# Altium PCB PCB1.PcbDoc
Units mil, origin at the board's own origin, x right, y up, seen from the top; angles counter-clockwise.
Board outline 2362.2 x 2362.2 mil, 2 copper layers (Top Layer, Bottom Layer); 63 components, 61 nets, 255 pads, 256 vias.
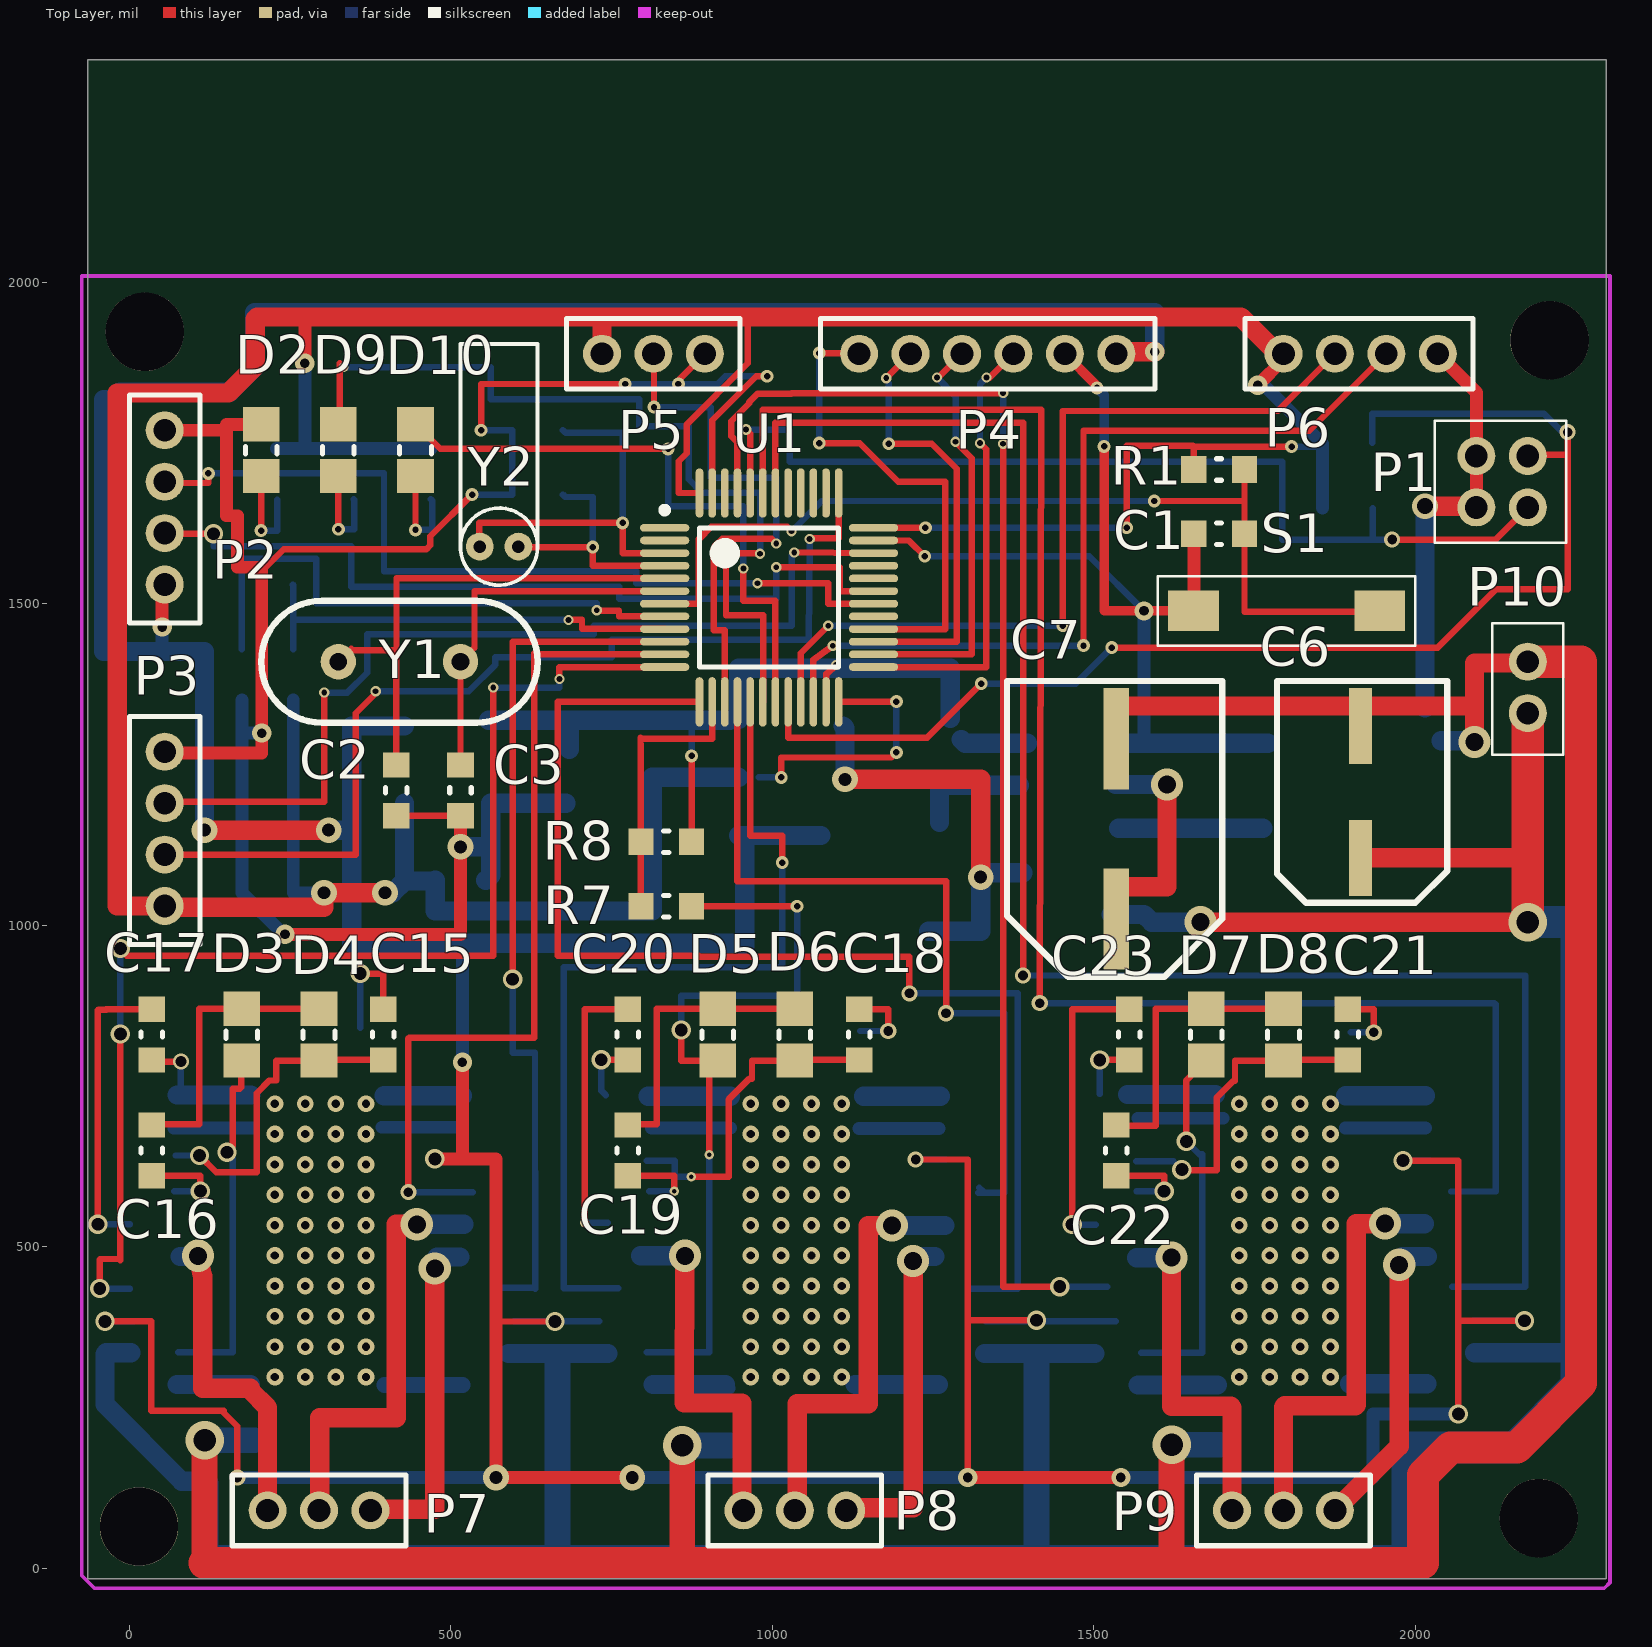
[diagram p0: Top Layer view]
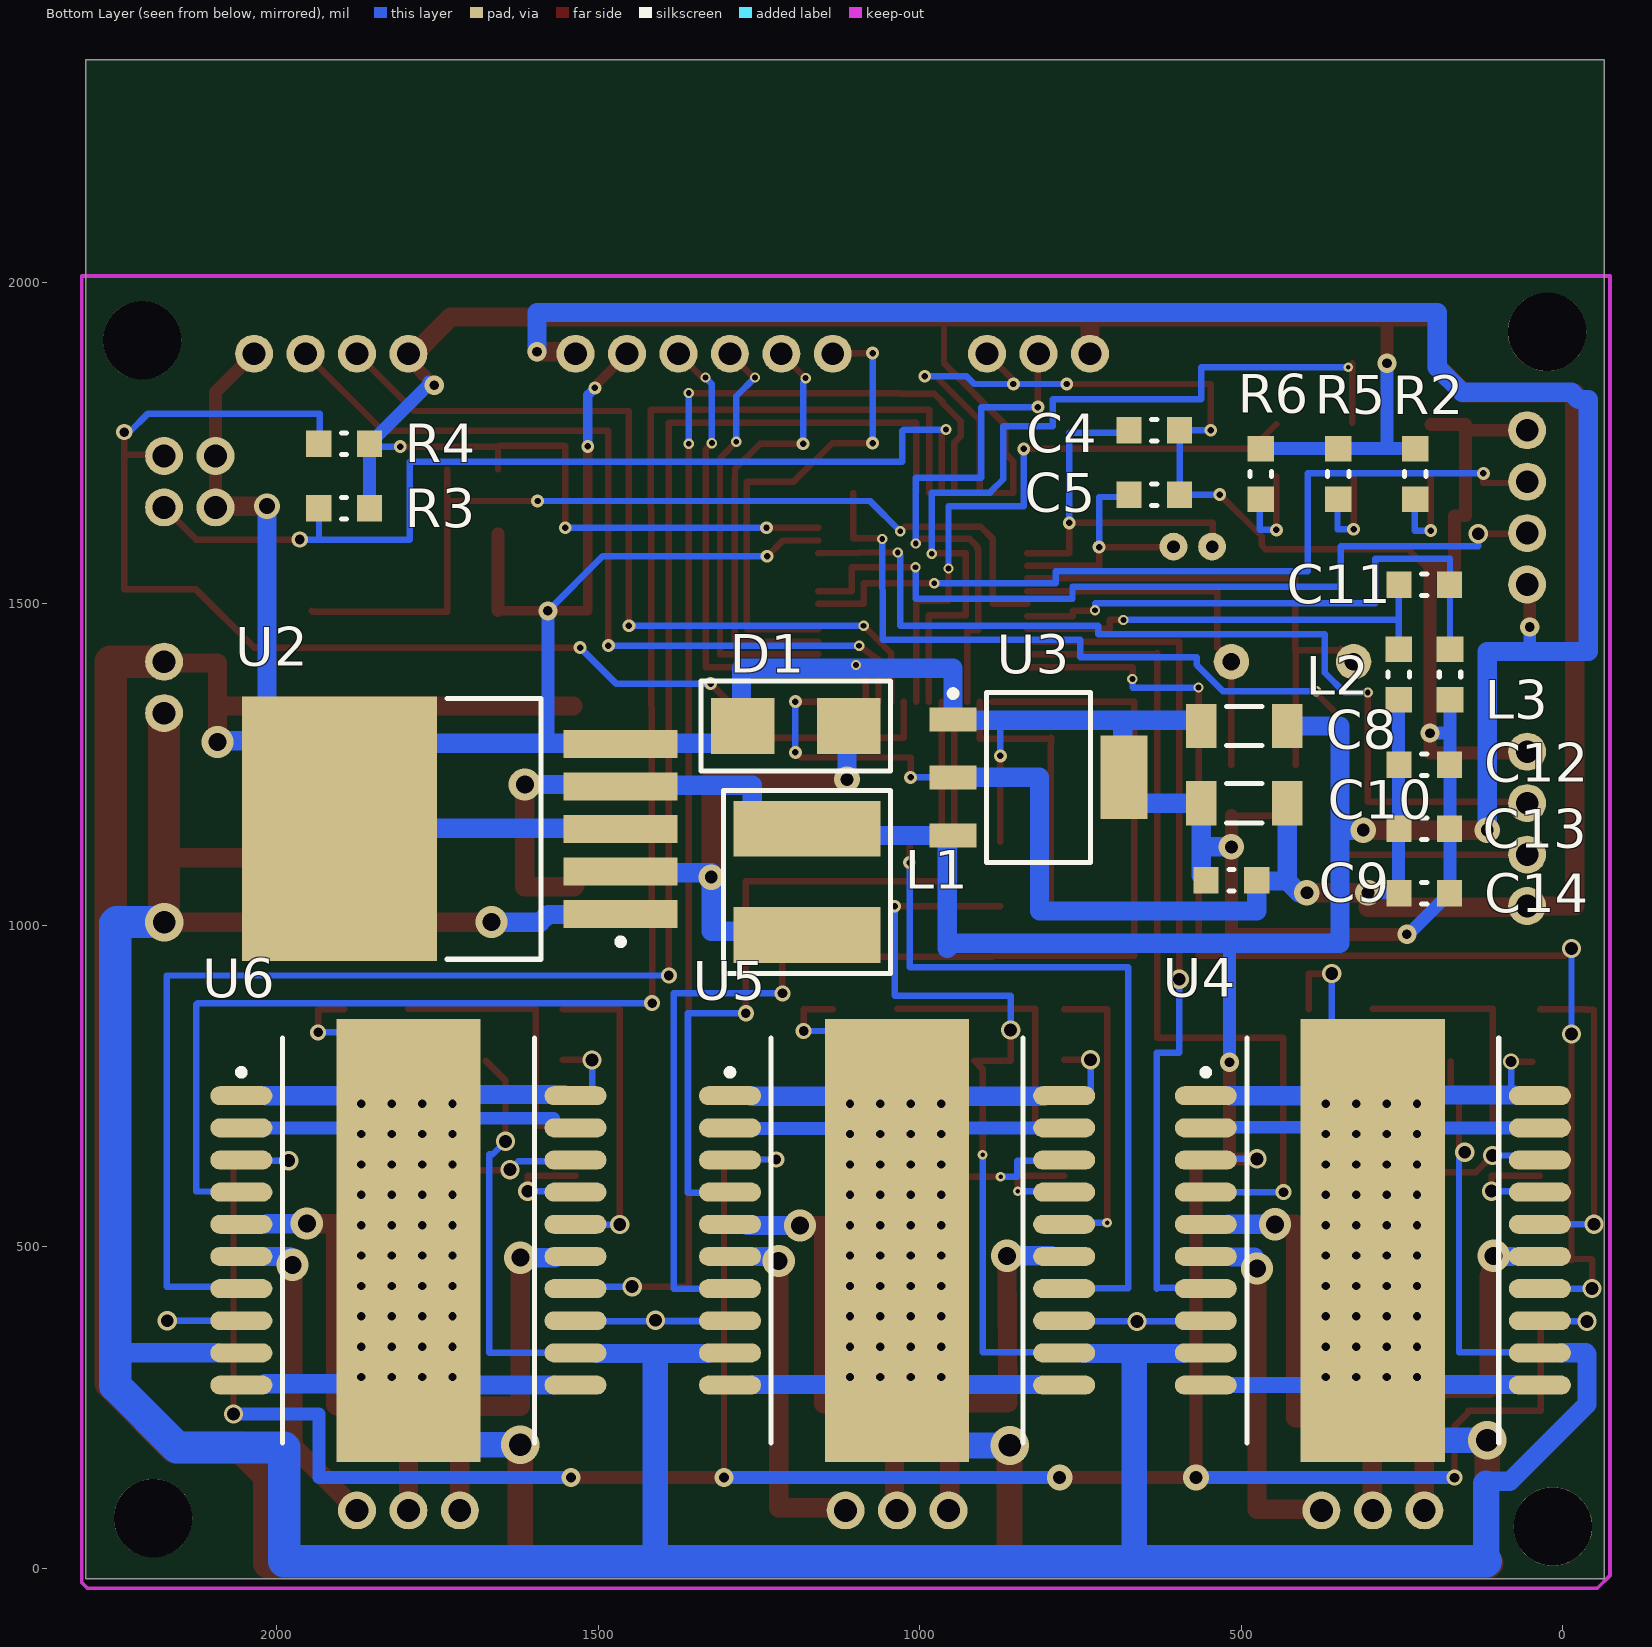
[diagram p1: Bottom Layer view, seen from below]

## Layer stack, top to bottom
Top Solder: solder mask 0.4, Solder Resist, Dk 3.5
Top Layer: signal copper 1.4
Dielectric1: dielectric 12.6, FR-4, Dk 4.8
Bottom Layer: signal copper 1.4
Bottom Solder: solder mask 0.4, Solder Resist, Dk 3.5

## Board outline
-65,-16 2297.2,-16 2297.2,2346.2 -25.63,2346.2 -65,2346.2

## Design rules (kind name [scope] priority, off if disabled: settings)
Clearance [All] p1: gap=7.87
FabricationTestPointUsage TestPointUsage [All] p1: valid=0 allowmultiple=FALSE
FabricationTestpoint Testpoint [All] p1: side=3 testpointundercomponent=TRUE minsize=40 maxsize=100 preferedsize=60 minholesize=0 maxholesize=40 preferedholesize=32 testpointgrid=1 allowsidetop=TRUE allowsidebottom=TRUE usegrid=TRUE gridtolerance=0.01
HoleSize [All] p1: absolutevalues=TRUE maxlimit=100 minlimit=9 maxpercent=80.000 minpercent=20.000
PolygonConnect [All] p1: connectstyle=Relief reliefconductorwidth=10 reliefentries=4 polygonreliefangle="90 Angle" airgapwidth=10
RoomDefinition Sheet1 [InComponentClass('Sheet1')] p1: confinementstyle=ConfineIn formatcopy=TRUE lockcomponents=FALSE outline -65,-20 -59.64,-15.44 2295,-15.44 2295,1985 -65,1985
RoutingPriority [All] p1: routingpriority=10
RoutingVias [All] p1: holewidth=23.62 width=39.37 viastyle="Through Hole" minholewidth=28 minwidth=50 maxholewidth=28 maxwidth=50
SolderMaskExpansion [All] p1: expansion=4
Width [All] p1: maxlimit=100 minlimit=5 preferedwidth=7.87 minimp=50.000000 maximp=50.000000 favimp=50.000000
26 further rules are at their usual default settings.

## Components (designator, comment, footprint, x,y, rotation, side; value= is the part's Value field where it differs from the comment)
C1 "Cap" 0603 1695,1609 r0 top
C2 "Cap" 0603 415,1210 r90 top
C3 "Cap" 0603 515,1210 r270 top
C4 "Cap" 0603 635,1770 r0 bottom
C5 "Cap" 0603 635,1670 r180 bottom
C6 "Cap Pol1" "25V 100uF 6*7" 1915,1210 r180 top
C7 "Cap Pol1" "25V 330uF 8*10" 1535,1150 r180 top
C8 "Cap Pol1" 1206 495,1310 r0 bottom
C9 "Cap" 0603 515,1070 r180 bottom
C10 "Cap Pol1" 1206 495,1190 r0 bottom
C11 "Cap" 0603 215,1530 r0 bottom
C12 "Cap" 0603 215,1250 r0 bottom
C13 "Cap" 0603 215,1150 r0 bottom
C14 "Cap" 0603 215,1050 r0 bottom
C15 "Cap" 0603 395,830 r270 top
C16 "Cap" 0603 35,650 r270 top
C17 "Cap" 0603 35,830 r90 top
C18 "Cap" 0603 1135,830 r270 top
C19 "Cap" 0603 775,650 r270 top
C20 "Cap" 0603 775,830 r90 top
C21 "Cap" 0603 1895,830 r270 top
C22 "Cap" 0603 1535,650 r270 top
C23 "Cap" 0603 1555,830 r90 top
D1 "Diode 1N4003" SMA 1195,1310 r180 bottom
D2 "D2" 0805 205,1739 r90 top
D3 "Diode 1N914" 0805 175,830 r90 top
D4 "Diode 1N914" 0805 295,830 r270 top
D5 "Diode 1N914" 0805 915,830 r90 top
D6 "Diode 1N914" 0805 1035,830 r270 top
D7 "Diode 1N914" 0805 1675,830 r90 top
D8 "Diode 1N914" 0805 1795,830 r270 top
D9 "D2" 0805 325,1739 r90 top
D10 "D2" 0805 445,1739 r90 top
L1 "Inductor" "330uH 5.8*5*4" 1175,1070 r0 bottom
L2 "Inductor" 0603 255,1390 r90 bottom
L3 "Inductor" 0603 175,1390 r90 bottom
P1 "BOOT" "2X2P 2MM" 2095,1730 r0 top
P2 "USART1" "4P 2mm" 55,1530 r90 top
P3 "SW" "4P 2mm" 55,1030 r90 top
P4 "RC" "6P 2mm" 1535,1889 r180 top
P5 "YAW_ANGLE" "3P 2mm" 735,1889 r0 top
P6 "MPU6050" "4P 2mm" 1795,1889 r0 top
P7 "Roll" "3P 2mm" 375,90 r180 top
P8 "Pitch" "3P 2mm" 1115,90 r180 top
P9 "Yaw" "3P 2mm" 1875,90 r180 top
P10 "Power" "2P 2mm" 2175,1330 r90 top
R1 "Res2" 0603 1695,1709 r0 top
R2 "Res2" 0603 229,1702 r90 bottom
R3 "Res2" 0603 1895,1649 r0 bottom
R4 "Res2" 0603 1895,1749 r0 bottom
R5 "Res2" 0603 349,1702 r270 bottom
R6 "Res2" 0603 469,1702 r270 bottom
R7 "Res2" 0603 835,1030 r180 top
R8 "Res2" 0603 835,1130 r0 top
S1 "SW-PB" SW3*6 1655,1489 r0 top
U1 "STM32F103C8T6" STM32F103C8T6 995,1510 r0 top
U2 "LM2575S" LM2575S-TO-263-5 1715,1150 r0 bottom
U3 "AMS1117" AMS1117 815,1230 r180 bottom
U4 "L6234D" L6234DD 295,510 r180 bottom
U5 "L6234D" L6234DD 1035,510 r180 bottom
U6 "L6234D" L6234DD 1795,510 r180 bottom
Y1 "8M" "XTAL 8M" 515,1410 r180 top
Y2 "32.768K" "XTAL 32.768K" 575,1589 r270 top

## Footprints (in the part's own frame and the unit in brackets; to place one, negate y for a bottom-side part, rotate by r counter-clockwise, add the part's x,y. Pads: shape width x height; smd on the part's side, far side on the other; paste and mask are expansions set on the pad)
"2P 2mm" [mm]
  round 1.5 hole 0.9: 1(0,0) 2(2.032,0)
  silkscreen extent -1.65,-1.4 3.56,1.4
"2X2P 2MM" [mm]
  round 1.5 hole 0.9: 1(0,0) 2(0,-2.032) 3(2.032,-2.032) 4(2.032,0)
  silkscreen extent -1.65,-3.43 3.56,1.4
"3P 2mm" [mm]
  round 1.5 hole 0.9: 1(0,0) 2(2.032,0) 3(4.064,0)
  silkscreen extent -1.4,-1.4 5.46,1.4
"4P 2mm" [mm]
  round 1.5 hole 0.9: 1(0,0) 2(2.032,0) 3(4.064,0) 4(6.096,0)
  silkscreen extent -1.52,-1.4 7.49,1.4
"6P 2mm" [mm]
  round 1.5 hole 0.9: 1(0,0) 2(2.032,0) 3(4.064,0) 4(6.096,0) 5(8.128,0) 6(10.16,0)
  silkscreen extent -1.52,-1.4 11.68,1.4
"25V 100uF 6*7" [mm]
  rect 0.9x3 smd: 1(0,2.667) 2(0,-2.54)
  silkscreen extent -3.43,-4.32 3.3,4.44
"25V 330uF 8*10" [mm]
  rect 1x4 smd: 1(0,3.556) 2(0,-3.556)
  silkscreen extent -4.19,-5.84 4.32,5.84
"330uH 5.8*5*4" [mm]
  rect 5.8x2.2 smd: 1(0,2.159) 2(0,-2.032)
  silkscreen extent -3.3,-3.56 3.3,3.68
0603 [mm] "Chip Resistor, 2-Leads, Body 1.6x0.8mm, IPC Low Density"
  rect 1x1.05 smd: 1(-1,0) 2(1,0)
  silkscreen extent -0.1,-0.43 0.1,0.43, body extent -0.8,-0.4 0.8,0.4, height 0.5
0805 [mm] "Chip Resistor, 2-Leads, Body 2.0x1.3mm, IPC Low Density"
  rect 1.35x1.45 smd: 1(-1.025,0) 2(1.025,0)
  silkscreen extent -0.15,-0.63 0.15,0.63, body extent -1,-0.64 1,0.64, height 1.25
1206 [mm] "Chip Resistor, 2-Leads, Body 3.2x1.6mm, IPC Low Density"
  rect 1.2x1.75 smd: 1(-1.7,0) 2(1.7,0)
  silkscreen extent -0.7,-0.77 0.7,0.77, body extent -1.6,-0.8 1.6,0.8, height 1.6
AMS1117 [mm] "SOT223, 4-Leads, Body 6.7x7.3mm (max), Pitch 2.29mm, IPC Low Density"
  rect 1.85x0.95 smd: 1(-3.375,2.29) 2(-3.375,0) 3(-3.375,-2.29)
  rect 1.85x3.3 smd: 4(3.375,0)
  silkscreen extent -3.5,-3.35 2.05,3.44, body extent -1.86,-3.35 1.86,3.35, height 1.8
L6234DD [mm] "SOIC, 20-Leads, Body 16.0x11.1mm (max), Pitch 1.27mm, IPC Low Density"
  oval 2.45x0.75 smd: 1(-6.6,5.715) 2(-6.6,4.445) 3(-6.6,3.175) 4(-6.6,1.905) 5(-6.6,0.635) 6(-6.6,-0.635) 7(-6.6,-1.905) 8(-6.6,-3.175) 9(-6.6,-4.445) 10(-6.6,-5.715) 11(6.6,-5.715) 12(6.6,-4.445) 13(6.6,-3.175) 14(6.6,-1.905) 15(6.6,-0.635) 16(6.6,0.635) 17(6.6,1.905) 18(6.6,3.175) 19(6.6,4.445) 20(6.6,5.715)
  rect 5.7x17.5 smd: 21(0,0)
  silkscreen extent -6.73,-8 4.98,8, body extent -5.55,-8 5.55,8, height 3.6
LM2575S-TO-263-5 [mm] "D2-PAK, 6-Pads, Body 9.7x10.3mm (max), IPC Low Density"
  rect 4.5x1.1 smd: 1(-6.35,3.36) 2(-6.35,1.68) 3(-6.35,0) 4(-6.35,-1.68) 5(-6.35,-3.36)
  rect 7.7x10.45 smd: 6(4.75,0)
  silkscreen extent -6.47,-5.15 0.5,5.15, body extent -3.2,-5.15 6.46,5.15, height 4.83
SMA [mm]
  rect 2.5x2.2 smd: 1(-2.032,0) 2(2.159,0)
  silkscreen extent -3.68,-1.78 3.81,1.78
STM32F103C8T6 [mm] "TSQFP, 48-Leads, Body 9.0x9.0mm (max), Pitch 0.50mm, IPC Low Density"
  oval 1.95x0.3 smd: 1(-4.125,2.75) 2(-4.125,2.25) 3(-4.125,1.75) 4(-4.125,1.25) 5(-4.125,0.75) 6(-4.125,0.25) 7(-4.125,-0.25) 8(-4.125,-0.75) 9(-4.125,-1.25) 10(-4.125,-1.75) 11(-4.125,-2.25) 12(-4.125,-2.75) 25(4.125,-2.75) 26(4.125,-2.25) 27(4.125,-1.75) 28(4.125,-1.25) 29(4.125,-0.75) 30(4.125,-0.25) 31(4.125,0.25) 32(4.125,0.75) 33(4.125,1.25) 34(4.125,1.75) 35(4.125,2.25) 36(4.125,2.75)
  oval 0.3x1.95 smd: 13(-2.75,-4.125) 14(-2.25,-4.125) 15(-1.75,-4.125) 16(-1.25,-4.125) 17(-0.75,-4.125) 18(-0.25,-4.125) 19(0.25,-4.125) 20(0.75,-4.125) 21(1.25,-4.125) 22(1.75,-4.125) 23(2.25,-4.125) 24(2.75,-4.125) 37(2.75,4.125) 38(2.25,4.125) 39(1.75,4.125) 40(1.25,4.125) 41(0.75,4.125) 42(0.25,4.125) 43(-0.25,4.125) 44(-0.75,4.125) 45(-1.25,4.125) 46(-1.75,4.125) 47(-2.25,4.125) 48(-2.75,4.125)
  silkscreen extent -4.25,-2.75 2.75,3.57, body extent -3.5,-3.5 3.5,3.5, height 1.6
SW3*6 [mm]
  rect 2x1.6 smd: 1(0,0) 2(7.366,0)
  silkscreen extent -1.4,-1.38 8.76,1.37
"XTAL 8M" [mm] "pin: 0.43,  pin2pin: 4.88, size: 11.05*4.7"
  round 1.4 hole 0.7: 1(0,0) 2(4.826,0)
  silkscreen extent -3.05,-2.41 7.87,2.41
"XTAL 32.768K" [mm] "3*8"
  round 1.1 hole 0.5: 1(0,0.762) 2(0,-0.762)
  silkscreen extent -8,-1.52 1.52,1.52

## Part data
C1 C2 C3 C4 C5 C9 C11 C12 C13 C14 C15 C16 C17 C18 C19 C20 C21 C22 C23: "Capacitor"
C6 C7 C8 C10: "Polarized Capacitor (Radial)"
D1: "1 Amp General Purpose Rectifier"
D2 D9 D10: library part LED3, "Typical BLUE SiC LED"
D3 D4 D5 D6 D7 D8: "High Conductance Fast Diode"
P1: library part "Header 2X2", "Header, 2-Pin, Dual row"
P2 P3: library part "Header 4H", "Header, 4-Pin, Right Angle"
P4: library part "Header 3X2", "Header, 3-Pin, Dual row"
P5 P7 P8 P9: library part "Header 3", "Header, 3-Pin"
P6: library part "Header 4", "Header, 4-Pin"
P10: library part "Header 2", "Header, 2-Pin"
R1 R2 R3 R4 R5 R6 R7 R8: "Resistor"
S1: "Switch"
Y1 Y2: library part XTAL, "Crystal Oscillator"

## Free pads (board coordinates)
  round 122.05 hole 122.05: 0(2192,78) 1(15,65) 2(2209,1910) 3(24,1923)

## Via types
v1: diameter 25.98, hole 12.99, Top Layer to Bottom Layer, tented top, 120 vias
v2: diameter 20, hole 10, Top Layer to Bottom Layer, 33 vias
v3: diameter 30, hole 20, Top Layer to Bottom Layer, 25 vias
v4: diameter 16, hole 9, Top Layer to Bottom Layer, 24 vias
v5: diameter 50, hole 28, Top Layer to Bottom Layer, 12 vias
v6: diameter 25, hole 15, Top Layer to Bottom Layer, 11 vias
v7: diameter 30, hole 15, Top Layer to Bottom Layer, 10 vias
v8: diameter 40, hole 20, Top Layer to Bottom Layer, 9 vias
v9: diameter 15, hole 7, Top Layer to Bottom Layer, 5 vias
v10: diameter 60, hole 35, Top Layer to Bottom Layer, 4 vias
v11: diameter 25, hole 17, Top Layer to Bottom Layer, 1 vias
v12: diameter 17, hole 9, Top Layer to Bottom Layer, 1 vias
v13: diameter 40, hole 25, Top Layer to Bottom Layer, 1 vias

## Nets (pads, with @x,y where several pads share a name; then routed paths per layer and width w, separated by ;. In a path a pad name is that pad's centre, name@x,y a point inside that pad or via, vN(x,y) a via of type N, cw(c..) or ccw(c..) an arc to the next point about the centre after c; other vN are vias at no path point)
3.3V: C9.2 C10.1 C12.2 C13.2 C14.2 L2.1 P3.1 P5.1 P6.1 R1.1 R2.2 R3.1 R4.1 R5.1 R6.1 U1.24 U1.36 U1.48 U3.2 | length 6864.2
  Top Layer w10: 865.5,1732.5 854.6,1721.6 854.6,1672.4 U1.48 U1.48@887,1672.67 ; 867,1734 867,1779 962,1874 962,1937 ; v2(1014,1230) 1014,1261 1185,1261 v2(1193,1269) ; U1.24@1103.67,1348 v2(1193,1348) ; U1.36 v2(1238,1618.27) ; v2(1551,1618.27) 1551,1746 1654.26,1746 1655.63,1744.63 ; R1.1 1655.63,1744.63 ; v2(1807.63,1744.63) 1655.63,1744.63
  Top Layer w20: P3.1 P3.1@57,1028 ; 272,1946 273,1945 v7(273,1874) ; v7(1755,1840) 1795,1880 P6.1
  Top Layer w30: P3.1 -19,1030 -19,1828 154,1828 196,1870 196,1943 ; P3.1@57,1028 302.63,1028 v8(302.63,1050.63) v8(397.63,1050.63) ; 199,1946 1729,1946 P6.1@1795,1880 ; P5.1 735,1944
  Bottom Layer w10: C14.2 C14.2@255,1050.63 ; v8(397.63,1050.63) v8@409.63,1050.63 ; U3.2@979,1230 v2(1014,1230) ; v2(1193,1269) v2(1193,1348) ; v2(1238,1618.27) v2(1551,1618.27) ; v2(1807.63,1744.63) R4.1@1851.26,1744.63
  Bottom Layer w20: R2.2 R6.1 ; L2.1 255,1050.63 v8(302.63,1050.63) ; 273,1741.37 v7(273,1874) ; v7@1763,1845 1763,1841.63 R4.1 R3.1
  Bottom Layer w30: v8@409.63,1050.63 428.07,1069.07 ; C10.1 428.07,1069.07 ; U3.2 947.5,1230.37 813.37,1230.37 813.37,1022.37 475.63,1022.37 C9.2 474.7,1069.07 428.07,1069.07
5V: C7.1 C8.1 L1.2 P2.1 P4.1 U2.4 U3.3 U4.3 U4.8 U4.13 U5.3 U5.8 U5.13 U6.3 U6.8 U6.13 | length 10165.4
  Top Layer w10: v3(-38,384) 34,384 34,245 147,245 147,242 168,221 v6(168,141) ; 570.16,383.84 v3(661.84,383.84) ; v6(1222.84,635.84) 1304.16,635.84 v7(1304.16,141.16) ; 1304.16,385.84 v3(1410.84,385.84) ; v3@1983,634 2067,634 v3(2067,240) ; 2068,385 v3(2170,385)
  Top Layer w20: v7(51,1464) 51,1526 P2.1 ; v3(475.16,636.84) 570.16,636.84 v8(570.16,141.16) v8(782.16,141.16) ; 518,636.84 v7(518,787) ; v7(1304.16,141.16) v7(1542.16,141.16)
  Top Layer w30: v8(117,1148) v8(310,1148) ; C7.1@1536,1062 1538,1060 1614,1060 v5(1614,1219) ; P4.1@1538,1892 v7(1595,1892)
  Bottom Layer w10: v3(-38,384) U4.13@6,384 ; v3(475.16,636.84) U4.3@520.84,636.84 ; 518,968 522,972 ; U4.8@599,384 U5.13@731,384 ; v6(1222.84,635.84) U5.3@1269.84,635.84 ; U5.8@1332,384 U6.13@1534.16,384 ; v3(1981,634) U6.3@2022,634 ; U6.8@2091,385 v3(2170,385)
  Bottom Layer w20: 51,1426 v7(51,1464) ; v6(168,141) v8(570.16,141.16) ; v7(518,787) 518,968 ; v8(782.16,141.16) v7(1304.16,141.16) ; v7(1542.16,141.16) 1934,141.16 1934,240 v3(2067,240)
  Bottom Layer w30: v8(117,1148) 117,1426 -40,1426 -40,1818 -25,1818 -14,1829 156,1829 195,1868 195,1953 1595,1953 v7(1595,1892) ; v8(310,1148) 346,1148 ; C8.1 346,1310 346,972 949,972 957,964 957,1138.84 U3.3@956,1139.84 ; U3.3 L1.2@1075.16,1139.84 ; L1.2@1260,1160 1260,1218 U2.4@1384,1218 ; U2.4@1534,1219 v5(1614,1219)
12V: C6.1 D3.1 D5.1 D7.1 P10.1 R7.1 U2.1 U4.9 U4.12 U5.9 U5.12 U6.9 U6.12 | length 8282.6
  Top Layer w10: v3(152,647) 161,656 161,746 172,746 ; 174,748 D3.1@174,788.65 ; v3(858.35,837.35) 858.35,789.65 D5.1 902,776.65 v9(902,643) ; R7.1@874.72,1029.65 v2(1038.65,1029.65) ; v3(1644,664) 1644,758.65 D7.1
  Top Layer w30: v5(1666,1005) v10(2175,1005) ; C6.1 2171,1105 2175,1109
  Top Layer w50: v10(2175,1005) P10.1
  Bottom Layer w10: U4.12@76,336 161,336 161,638 v3(152,647) ; U5.12@805,336 902,336 v9(902,643) ; v3(858.35,837.35) 858.35,890.35 1038.65,890.35 v2(1038.65,1029.65) ; U6.12@1574,335 1669,335 1669,644 1664,644 v3(1644,664)
  Bottom Layer w20: 666,9 668,7 ; 1423,10 1426,7
  Bottom Layer w30: -36.17,334.83 -38,333 -38,255 81.5,135.5 115.5,135.5 119,132 ; -36,335 U4.12@2,335 ; U4.9@590,334 U5.12@744,334 ; U5.9@1330,334 U6.12@1502,334 ; U2.1@1527,1017 1578,1017 1590,1005 v5(1666,1005) ; U6.9@2092,335 2251,335
  Bottom Layer w40: 119,11 119,132 ; 666,9 666,326 ; 1411,9 1411,324
  Bottom Layer w43.62: v10(2175,1005) v10@2177,1003
  Bottom Layer w50: 119,11 1988,11 1988,188 2155,188 2251,284 2251,1003 ; v10(2175,1005) 2249,1005
BOOT0: P1.3 R3.2 U1.44 | length 1556.4
  Top Layer w10: v12(959,1771) 965.47,1764.53 U1.44 ; v6(1964,1600) 2125,1600 P1.3
  Bottom Layer w10: v12(959,1771) 1025,1771 1027,1769 1027,1721 1793,1721 1793,1600 v6(1964,1600) ; 1934,1600 R3.2@1934,1648.63
BOOT1: P1.4 R4.2 U1.20 | length 2029.4
  Top Layer w10: U1.20 1024.53,1292 1241,1292 v2(1325,1376) ; v2(1528,1432) 2035,1432 2126,1523 2237,1523 v6(2237,1767) ; P1.4@2177,1732 2237,1732
  Bottom Layer w10: v2(1325,1376) 1472,1376 v2(1528,1432) ; R4.2@1933,1750.37 1933,1796 2200,1796 2229,1767 v6(2237,1767)
ERR_LED: D10.2 U1.19 | length 969.1
  Top Layer w10: D10.2 483.35,1741 v2(838,1741) ; v4(955,1555) 955,1504.84 1004.84,1504.84 U1.19
  Bottom Layer w10: v2(838,1741) 838,1652 955,1652 v4(955,1555)
GND: C1.1 C2.1 C3.2 C4.1 C5.2 C6.2 C7.2 C8.2 C9.1 C10.2 C12.1 C13.1 C14.1 C15.1 C17.1 C18.1 C20.1 C21.1 C23.1 D1.1 D2.2 L3.1 P1.1 P1.2 P2.4 P3.4 P4.2 P5.3 P6.4 P10.2 R8.2 S1.1 U1.23 U1.35 U1.47 U2.3 U2.5 U2.6 U3.1 U3.4 U4.1 U4.2 U4.10 U4.11 U4.19 U4.20 U4.21 U5.1 U5.2 U5.10 U5.11 U5.19 U5.20 U5.21 U6.1 U6.2 U6.10 U6.11 U6.19 U6.20 U6.21 | length 15305.4
  Top Layer w10: C17.1@47,788 v11(80,788) ; 206,1557 212,1557 240,1585 462,1585 468,1591 468,1605 v2(533,1670) ; v3(359,925) 395,925 C15.1 ; C2.1 C3.2 C3.2@513,1168.63 ; v2(547,1770) 547,1842 v2(771,1842) ; v3@735,790.63 C20.1 ; v2(854,1842) 854,1848 P5.3 ; R8.2 v2(874.37,1263.63) ; U1.47 906.42,1785.42 975,1854 v2(992,1854) ; U1.23 1083.58,1391.58 1085.58,1391.58 v4(1099,1405) ; C18.1 1180.37,869.37 v6(1180.37,835.63) ; U1.35 1212.42,1598.58 v2(1237,1574) ; v3(1509.37,790.63) C23.1 ; C21.1 1935.37,869.37 v6(1935.37,833.63)
  Top Layer w15: P4.2 1505,1839 v2(1505,1836) ; v2(1516,1745) 1516,1489 S1.1
  Top Layer w20: P2.4 148,1770 151,1767 ; P3.4@57,1268 206,1268 206,1557 168,1557 168,1637 151,1637 151,1779 D2.2@204.65,1779 ; v7(242,986) 515,986 C3.2 ; S1.1@1655.63,1489.63 C1.1 ; P6.4 2095,1829 P1.2
  Top Layer w30: C7.2@1539,1341 2092,1341 ; v13(2015,1652) P1.2@2093,1652 ; v5(2092,1285) 2092,1408 2173,1408 P10.2
  Top Layer w40: 117,8 v10(117,199) ; 860,8 v10(860,191) ; 1621,19 v10(1621,192)
  Top Layer w50: 117,8 2012,8 2012,145 2055,188 2158,188 2258,288 2258,1410 P10.2
  Bottom Layer w10: U4.20@80,736 v11(80,788) ; C14.1@175,1050.63 C14.1 ; U4.21@359,841 v3(359,925) ; v2(533,1670) C5.2 C4.1 v2(547,1770) ; v3(734,791) 734,743 U5.20@741,736 ; v2(771,1842) 915,1842 927,1854 v2(992,1854) ; v2(874.37,1263.63) 874.37,1317.63 ; U5.21@1136.37,835.63 v6(1180.37,835.63) ; v2(1237,1574) 1493,1574 v7(1578,1489) ; U6.20@1509.37,737.63 v3(1509.37,790.63) ; U6.21@1899.37,833.63 v6(1935.37,833.63)
  Bottom Layer w15: v2(1505,1836) 1516,1825 v2(1516,1745)
  Bottom Layer w20: U4.19@69,685 U4.21@193,685 ; C14.1@175,1050.63 L3.1 ; 175,1299 v7(206,1299) ; C14.1 239.63,986 v7(242,986) ; U4.21@393,686 U4.2@513,686 ; U5.19@812,685 U5.21@935,685 ; U5.21@927,286 U5.21@933,280 ; U5.21@1135,684 U5.2@1259,684 ; 1569,700 U6.21@1701,700 ; 1578,1283 v7(1578,1489) ; U6.21@1891,685 U6.2@2016,685
  Bottom Layer w25: U4.21@397,285 U4.10@518,285
  Bottom Layer w30: U4.11@74,286 U4.21@188,286 ; U4.20@74,736 U4.21@189,736 ; U4.21@396,735 U4.1@518,735 ; v8(515,1122) 561.93,1122 ; C9.1 561.93,1077.56 C10.2 U3.4@679,1190 ; C8.2@559,1319 U3.1@934,1319 ; U3.4@684,1274 684,1319 ; U5.20@807,734 U5.21@935,734 ; U5.11@815,286 U5.21@927,286 ; U3.1 947.87,1399.87 1276.87,1399.87 D1.1@1276.87,1322.13 ; U5.21@1129,286 U5.10@1258,286 ; U5.21@1142,734 U5.1@1261,734 ; D1.1@1294,1289 1300,1283 U2.5@1397,1283 ; U2.5@1537,1283 U2.6@1771,1283 ; U2.3@1539,1151 U2.6@1763,1151 ; U6.20@1553,737 U6.21@1689,737 ; U6.11@1569,285 U6.21@1692,285 ; U6.21@1892,735 U6.1@2016,735 ; U6.21@1898,287 U6.10@2018,287 ; U2.6@2015,1338 v13(2015,1652) ; U2.6@2040,1287 v5@2079,1287
  Bottom Layer w40: v10(117,199) U4.21@195,199 ; v10(860,191) U5.21@934,191 ; v10(1621,192) U6.21@1696,192
  other v1: 226.38,297.4 273.62,297.4 320.87,297.4 368.11,297.4 966.38,297.4 1013.62,297.4 1060.87,297.4 1108.11,297.4 1726.38,297.4 1773.62,297.4 1820.87,297.4 1868.11,297.4 226.38,344.65 273.62,344.65 320.87,344.65 368.11,344.65 966.38,344.65 1013.62,344.65 1060.87,344.65 1108.11,344.65 1726.38,344.65 1773.62,344.65 1820.87,344.65 1868.11,344.65 226.38,391.89 273.62,391.89 320.87,391.89 368.11,391.89 966.38,391.89 1013.62,391.89 1060.87,391.89 1108.11,391.89 1726.38,391.89 1773.62,391.89 1820.87,391.89 1868.11,391.89 226.38,439.13 273.62,439.13 320.87,439.13 368.11,439.13 966.38,439.13 1013.62,439.13 1060.87,439.13 1108.11,439.13 1726.38,439.13 1773.62,439.13 1820.87,439.13 1868.11,439.13 226.38,486.38 273.62,486.38 320.87,486.38 368.11,486.38 966.38,486.38 1013.62,486.38 1060.87,486.38 1108.11,486.38 1726.38,486.38 1773.62,486.38 1820.87,486.38 1868.11,486.38 226.38,533.62 273.62,533.62 320.87,533.62 368.11,533.62 966.38,533.62 1013.62,533.62 1060.87,533.62 1108.11,533.62 1726.38,533.62 1773.62,533.62 1820.87,533.62 1868.11,533.62 226.38,580.87 273.62,580.87 320.87,580.87 368.11,580.87 966.38,580.87 1013.62,580.87 1060.87,580.87 1108.11,580.87 1726.38,580.87 1773.62,580.87 1820.87,580.87 1868.11,580.87 226.38,628.11 273.62,628.11 320.87,628.11 368.11,628.11 966.38,628.11 1013.62,628.11 1060.87,628.11 1108.11,628.11 1726.38,628.11 1773.62,628.11 1820.87,628.11 1868.11,628.11 226.38,675.35 273.62,675.35 320.87,675.35 368.11,675.35 966.38,675.35 1013.62,675.35 1060.87,675.35 1108.11,675.35 1726.38,675.35 1773.62,675.35 1820.87,675.35 1868.11,675.35 226.38,722.6 273.62,722.6 320.87,722.6 368.11,722.6 966.38,722.6 1013.62,722.6 1060.87,722.6 1108.11,722.6 1726.38,722.6 1773.62,722.6 1820.87,722.6 1868.11,722.6
NetC15_2: C15.2 D4.2 U4.18 | length 494.9
  Top Layer w10: v3(109,642) 135,616 198,616 198,739 217.65,758.65 228.35,758.65 228.35,789.65 D4.2 ; D4.2@295.98,790.63 C15.2
  Bottom Layer w10: U4.18@72,642 v3(109,642)
NetC16_1: C16.1 D3.2 D4.1 | length 440.4
  Top Layer w10: C16.1 35.98,690.35 108.65,690.35 108.65,870.35 D3.2 D4.1
NetC16_2: C16.2 U4.17 | length 140.1
  Top Layer w10: C16.2 110.37,610.63 v3(110.37,586.63)
  Bottom Layer w10: U4.17@69.63,586.63 v3(110.37,586.63)
NetC17_2: C17.2 U4.16 | length 467.6
  Top Layer w10: v3(-49,535) -49,868 -48,869 -36,869 -35.63,869.37 C17.2
  Bottom Layer w10: v3(-49,535) U4.16@1,535
NetC18_2: C18.2 D6.2 U5.18 | length 516.9
  Top Layer w10: v9(874,609) 932,609 932,729 964.65,761.65 968.35,761.65 968.35,789.65 D6.2 1035.98,790.63 C18.2
  Bottom Layer w10: U5.18@805,634 848,634 848,609 v9(874,609)
NetC19_1: C19.1 D5.2 D6.1 | length 440.4
  Top Layer w10: C19.1 775.98,690.35 820.35,690.35 820.35,870.35 D5.2 D6.1
NetC19_2: C19.2 U5.17 | length 135.4
  Top Layer w10: C19.2 847.37,610.63 v9(847.37,586.37)
  Bottom Layer w10: U5.17@808.63,586.37 v9(847.37,586.37)
NetC20_2: C20.2 U5.16 | length 434.6
  Top Layer w10: v9(708.37,537.37) 708.37,869.37 C20.2
  Bottom Layer w10: v9(708.37,537.37) U5.16@744.37,537.37
NetC21_2: C21.2 D8.2 U6.18 | length 500.9
  Top Layer w7: v3@1637,611 v3@1645,619 ; 1717.35,758.35 1719.65,758.35
  Top Layer w10: v3@1645,619 1691,619 1691,732 1717.35,758.35 ; 1719.65,758.35 1719.65,789.65 D8.2 ; D8.2@1795.98,790.63 C21.2
  Bottom Layer w7: 1624,633 v3(1637,620) v3@1637,611
  Bottom Layer w10: U6.18@1566,633 1624,633
NetC22_1: C22.1 D7.2 D8.1 | length 441
  Top Layer w10: C22.1@1536.02,688.35 1596.65,688.35 1596.65,870.35 D7.2 D8.1
NetC22_2: C22.2 U6.17 | length 141.6
  Top Layer w10: C22.2 1609.37,610.63 v3(1609.37,586.37)
  Bottom Layer w10: U6.17@1566.37,586.37 v3(1609.37,586.37)
NetC23_2: C23.2 U6.16 | length 460.4
  Top Layer w10: v3(1466.37,534.63) 1466.37,869.37 C23.2
  Bottom Layer w10: v3(1466.37,534.63) U6.16@1503.37,534.63
NetD1_2: D1.2 L1.1 U2.2 | length 685.2
  Top Layer w30: v8(1113,1227) 1324,1227 v8(1324,1075)
  Bottom Layer w30: D1.2 1113,1307 v8(1113,1227) ; L1.1@1243,991 1324,991 1324,1082 U2.2@1390,1082
NetD2_1: D2.1 R2.1 | length 157.3
  Top Layer w10: v2(205,1614) D2.1
  Bottom Layer w10: v2(205,1614) 230,1614 R2.1@230,1661.63
NetD9_1: D9.1 R5.2 | length 154.7
  Top Layer w10: v2(325,1616) D9.1
  Bottom Layer w10: v2(325,1616) 350,1616 350,1661.63 R5.2
NetD10_1: D10.1 R6.2 | length 158.1
  Top Layer w10: v2(445,1615) D10.1
  Bottom Layer w10: v2(445,1615) 471,1615 471,1660.63 R6.2
NRST: C1.2 R1.2 S1.2 U1.7 | length 1465.7
  Top Layer w10: U1.7 885.84,1500.16 885.84,1600.84 905,1620 1023,1620 v4(1030,1613) ; v2(1594,1660) 1733.37,1660 1734.37,1661 ; R1.2 1734.37,1487.63 1943.63,1487.63 S1.2
  Bottom Layer w10: v4(1030,1613) 1077,1660 v2(1594,1660)
OSC32_IN: C4.2 U1.3 Y2.2 | length 607.3
  Top Layer w10: Y2.2 544,1590 544,1625.9 v2(767.1,1625.9) 767.1,1578.9 U1.3
  Bottom Layer w10: C4.2 678.47,1765.9 767.1,1765.9 v2(767.1,1625.9)
OSC32_OUT: C5.1 U1.4 Y2.1 | length 382.6
  Top Layer w10: Y2.1@605,1588.21 v2(720.79,1588.21) 720.79,1559.21 U1.4
  Bottom Layer w10: C5.1 678.16,1666.21 720.79,1666.21 v2(720.79,1588.21)
OSC_IN: C2.2 U1.5 Y1.2 | length 778.3
  Top Layer w10: 345,1430 347,1428 415,1428 ; C2.2 415,1428 ; U1.5 415.53,1539.53 415.53,1428.53 415,1428
OSC_OUT: C3.1 U1.6 Y1.1 | length 572.7
  Top Layer w10: C3.1 Y1.1 535,1430 ; 536.84,1431.84 536.84,1519.84 U1.6
PITCH_A: P8.1 U5.6 | length 523.7
  Top Layer w20: P8.1 P8.1@1118,93
  Top Layer w25: P8.1@1118,93 P8.1@1119,94
  Top Layer w30: P8.1@1119,94 1219,94 v5(1219,478)
  Bottom Layer w30: v5@1219,485 U5.6@1253,485
PITCH_B: P8.2 U5.5 | length 673.7
  Top Layer w25: P8.2 P8.2@1039,94
  Top Layer w30: P8.2@1039,94 1039,256 1149,256 1149,533 v5(1186,533)
  Bottom Layer w30: v5(1186,533) U5.5@1268,533
PITCH_C: P8.3 U5.15 | length 555.8
  Top Layer w25: P8.3@953,92 P8.3
  Top Layer w30: v5(864,486) 863,257 953,257 P8.3@953,92
  Bottom Layer w30: U5.15@795,486 v5(864,486)
PWM1_1: U1.10 U4.7 | length 1333.9
  Top Layer w10: v3(596.1,916.1) 596.1,1441.1 U1.10
  Bottom Layer w10: U4.7@575,436 630,436 631,435 631,617 630.9,617.1 630.9,802.1 596.1,802.1 v3(596.1,916.1)
PWM1_2: U1.11 U4.4 | length 1336.2
  Top Layer w10: v6(434,585) 434,824 435,825 630,825 630,1423 ; 630,1421 630.42,1421.42 U1.11
  Bottom Layer w10: v6(434,585) U4.4@534,585
PWM1_3: U1.12 U4.14 | length 1910.1
  Top Layer w10: v3(-46,435) -46,480 -45,481 -16,481 -14,479 v3(-14,831) ; v3@-14,963 -4,953 566,953 v4(566,1370) ; v4@668.73,1383.27 668.73,1401.73 U1.12
  Bottom Layer w10: v3(-46,435) U4.14@1,435 ; v3(-14,831) v3(-14,964) ; v4(566,1370) 566.27,1369.73 668.73,1369.73 v4@668.73,1383.27
  other v4: 669,1383
PWM2_1: U1.13 U5.7 | length 1917.6
  Top Layer w10: U1.13 666.4,1347.6 666.4,952.4 885.6,952.4 886.73,951.27 1213.27,951.27 v6(1213.27,894.27)
  Bottom Layer w10: v6(1213.27,894.27) 1380.73,894.27 ; U5.7@1311,435 1382,435 1382,894.27
PWM2_2: U1.16 U5.4 | length 1227.9
  Top Layer w10: U1.16 945.79,1068.79 1270.21,1068.79 v6(1270.21,863.21)
  Bottom Layer w10: v6(1270.21,863.21) 1360.79,863.21 1360.79,584 U5.4@1320,584 ; U5.4@1322,592 U5.4@1328,586
PWM2_3: U1.17 U5.14 | length 1387.2
  Top Layer w10: U1.17 965.47,1139.47 1015.53,1139.47 v2(1015.53,1097.47)
  Bottom Layer w10: U5.14@760.47,435.53 675.47,435.53 675.47,934.47 1015.53,934.47 v2(1015.53,1097.47)
PWM3_1: U1.42 U6.7 | length 2732.6
  Top Layer w10: U1.42 1004.84,1781.84 1390,1781.84 v6(1390,922)
  Bottom Layer w10: v6(1390,922) 2171,922 2171,438 U6.7@2057.84,438
PWM3_2: U1.43 U6.4 | length 2555.4
  Top Layer w10: U1.43 985.16,1802 1418,1802 v6(1416,879)
  Bottom Layer w10: v6(1416,879) 2123,879 2125,877 2125,586 U6.4@2055.84,586
PWM3_3: U1.45 U6.14 | length 2109.7
  Top Layer w10: U1.45 945.79,1751.21 936,1761 936,1784 964,1812 964,1814 977,1827 1029.21,1827 1030,1827.79 v4(1359,1827.79) ; v4(1359,1749) 1359,438 v3(1447,438)
  Bottom Layer w10: v4(1359,1749) v4(1359,1827.79) ; v3(1447,438) U6.14@1521,438
PWR_SENS: R7.2 R8.1 U1.14 | length 429
  Top Layer w10: 795,1292 795.63,1274.63 R7.2 ; 797,1290 906.42,1290 U1.14
RC_CH1: P4.3 U1.25 | length 691.1
  Top Layer w10: U1.25 1332.73,1401.73 1332.73,1740.27 v4(1323,1750) ; v4(1333,1852) 1338,1852 P4.3
  Bottom Layer w10: v4(1323,1750) 1323,1842 v4(1333,1852)
RC_CH2: P4.4 U1.26 | length 660.5
  Top Layer w10: U1.26 1310.42,1421.42 1310.42,1726.58 v4(1285,1752) ; v4(1256,1852) 1258,1852 P4.4
  Bottom Layer w10: v4(1256,1852) 1285,1823 v4(1285,1752)
RC_CH3: P4.5 U1.27 | length 680.2
  Top Layer w10: U1.27 1287.1,1441.1 1287.1,1694 ; v4(1177.22,1851.11) 1176,1850 P4.5 ; v2(1181,1749) 1248,1749 1287,1710 1287,1694.34
  Bottom Layer w10: v4(1177.22,1851.11) 1181,1843 v2(1181,1749)
RC_CH4: P4.6 U1.28 | length 762.2
  Top Layer w10: v2(1073,1750) 1136,1750 1196,1690 1268.79,1690 1268.79,1460.79 U1.28 ; v2(1073,1890) P4.6@1134,1890
  Bottom Layer w10: v2(1073,1750) v2(1073,1890)
ROLL_A: P7.1 U4.6 | length 507
  Top Layer w30: P7.1@377,92 475,92 v5(475,466)
  Bottom Layer w30: v5@479,484 U4.6@514,484
ROLL_B: P7.2 U4.5 | length 670.2
  Top Layer w25: P7.2 P7.2@296,91
  Top Layer w30: P7.2@296,91 296,234 415,234 ; 413,234 415,236 415,535 v5(447,535)
  Bottom Layer w30: v5(447,535) U4.5@520,535
ROLL_C: P7.3 U4.15 | length 509.9
  Top Layer w20: 188,277 188,280
  Top Layer w30: v5(107,486) 114,454 114,280 188,280 ; 188,277 215,250 P7.3
  Bottom Layer w30: U4.15@79,485 v5@107,485
RX: P2.2 U1.31 | length 1289.4
  Top Layer w10: P2.2@55.84,1609.16 v3@130.84,1609.16 ; v4(1006.16,1556.84) 1105.16,1556.84 1105.16,1519.84 U1.31
  Bottom Layer w10: P2.2 P2.2@55.84,1609.16 ; v3@130.84,1609.16 130.84,1589.84 344.84,1589.84 344.84,1526.84 762.16,1526.84 762.16,1508.16 1006.16,1508.16 v4(1006.16,1556.84)
  other v3: 131,1609
SCL: P6.2 U1.21 | length 1295
  Top Layer w10: U1.21 1044.21,1423.21 v4(1087,1466) ; v2(1452,1466) 1452,1800 1786,1800 P6.2
  Bottom Layer w10: v4(1087,1466) v2(1452,1466)
SDA: P6.3 U1.22 | length 1347.4
  Top Layer w10: U1.22 1063.9,1412.9 v4(1094,1435) ; v2(1484,1435) 1484,1769 1835,1769 P6.3
  Bottom Layer w10: v4(1094,1435) v2(1484,1435)
SWCLK: P3.2 U1.37 | length 1565.5
  Top Layer w10: P3.2 352,1110 352,1330 383,1361 v4(383,1364) ; v4@1059,1602 1103.27,1602 U1.37
  Bottom Layer w10: v4(383,1364) 528,1364 569,1405 569,1417 750,1417 750,1444 1057,1444 v4(1058,1601)
SWDIO: P3.3 U1.34 | length 1470.7
  Top Layer w10: P3.3 57,1192 303,1192 v4(303,1362) ; v4(1034,1579.97) U1.34
  Bottom Layer w10: v4(303,1362) 339,1362 370,1393 370,1453 722,1453 722,1466 1030,1466 1030,1575.97 v4(1034,1579.97)
SYS_LED: D9.2 U1.18 | length 1360.2
  Top Layer w10: D9.2@327,1781.35 327,1874 ; v4@980,1579 928,1579 928,1482 986,1482 U1.18@986,1347.76
  Bottom Layer w10: v9(333,1868) 562,1868 562,1818 793,1818 793,1776 870,1776 870,1694 890,1674 890,1673 981,1673 v4(981,1578)
TX: P2.3 U1.30 | length 1321
  Top Layer w10: P2.3 57,1688 123,1688 v2(123,1703) ; v4(977,1532.16) 1086.84,1532.16 1086.84,1500.16 U1.30
  Bottom Layer w10: v2(123,1703) 396,1703 396,1551 411,1551 411.16,1550.84 788.16,1550.84 788.16,1532.16 v4(977,1532.16)
VDDA: C11.2 L2.2 U1.9 | length 692.6
  Top Layer w10: v4(683,1475) 704,1475 704,1461 832.39,1461 U1.9
  Bottom Layer w10: C11.2 255,1529.37 L2.2 ; 255,1475 v4(683,1475)
VSSA: C11.1 L3.2 U1.8 | length 886.7
  Top Layer w10: v4@727.53,1489.47 761.53,1489.47 761.53,1480.47 U1.8
  Bottom Layer w10: L3.2 175,1570 291,1570 291,1501 727,1501 v4(727,1490)
YAW_A: P9.1 U6.6 | length 462.4
  Top Layer w20: P9.1 P9.1@1876,91
  Top Layer w30: P9.1@1876,91 1975,190 v5(1975,472)
  Bottom Layer w30: v5@1980,485 U6.6@2019,485
YAW_B: P9.2 U6.5 | length 663.2
  Top Layer w30: P9.2 1795,251 1797,253 1907,253 1908,254 1908,536 v5(1953,536)
  Bottom Layer w30: v5(1953,536) U6.5@2014,536
YAW_C: P9.3 U6.15 | length 546.9
  Top Layer w20: P9.3@1710,85 P9.3
  Top Layer w30: v5(1621,483) 1621,252 1713,252 1715,250 P9.3
  Bottom Layer w30: U6.15@1567,483 v5(1621,483)
YAW_SENS: P5.2 U1.15 | length 849
  Top Layer w10: P5.2 816,1888 v2(816,1806) ; U1.15 926.1,1459.1 908.9,1459.1 908.9,1586 910,1586 910.13,1586.13 910.13,1589.13 922,1601 999,1601 v4(1006,1594)
  Bottom Layer w10: v2(816,1806) 904,1806 904,1696 1006,1696 v4(1006,1594)
pads on no net: U1.1 U1.2 U1.29 U1.32 U1.33 U1.38 U1.39 U1.40 U1.41 U1.46

## Keep-outs
Keep-Out Layer:
  lines w5.91: -74,-11 -74,2010 2303,2010 2303,-22 2294,-31 -54,-31 -74,-11